# Altium PCB Master v2.PcbDoc
Units mil, origin at the board's own origin, x right, y up, seen from the top; angles counter-clockwise.
Board outline 1480 x 1080 mil, 2 copper layers (Top Layer, Bottom Layer); 28 components, 24 nets, 68 pads, 15 vias.
Unrouted connection lines stored in the file: 5.
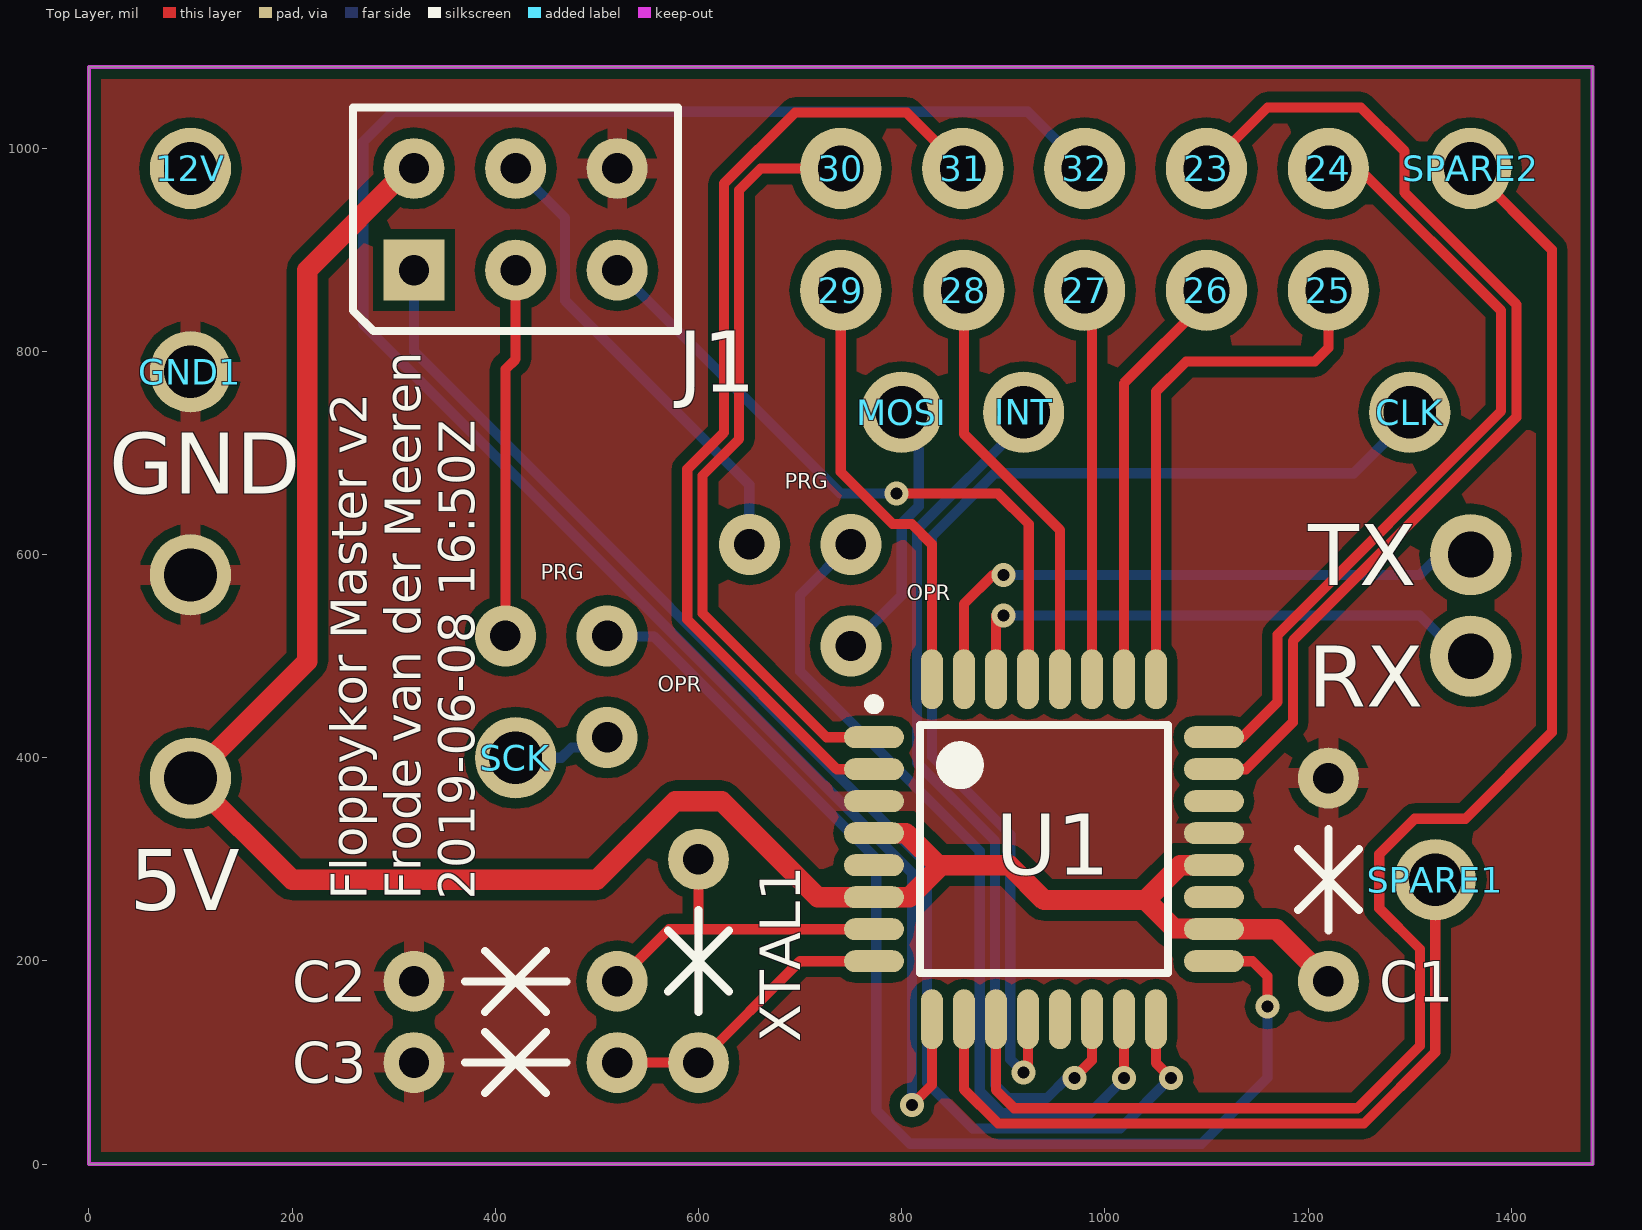
[diagram p0: Top Layer view]
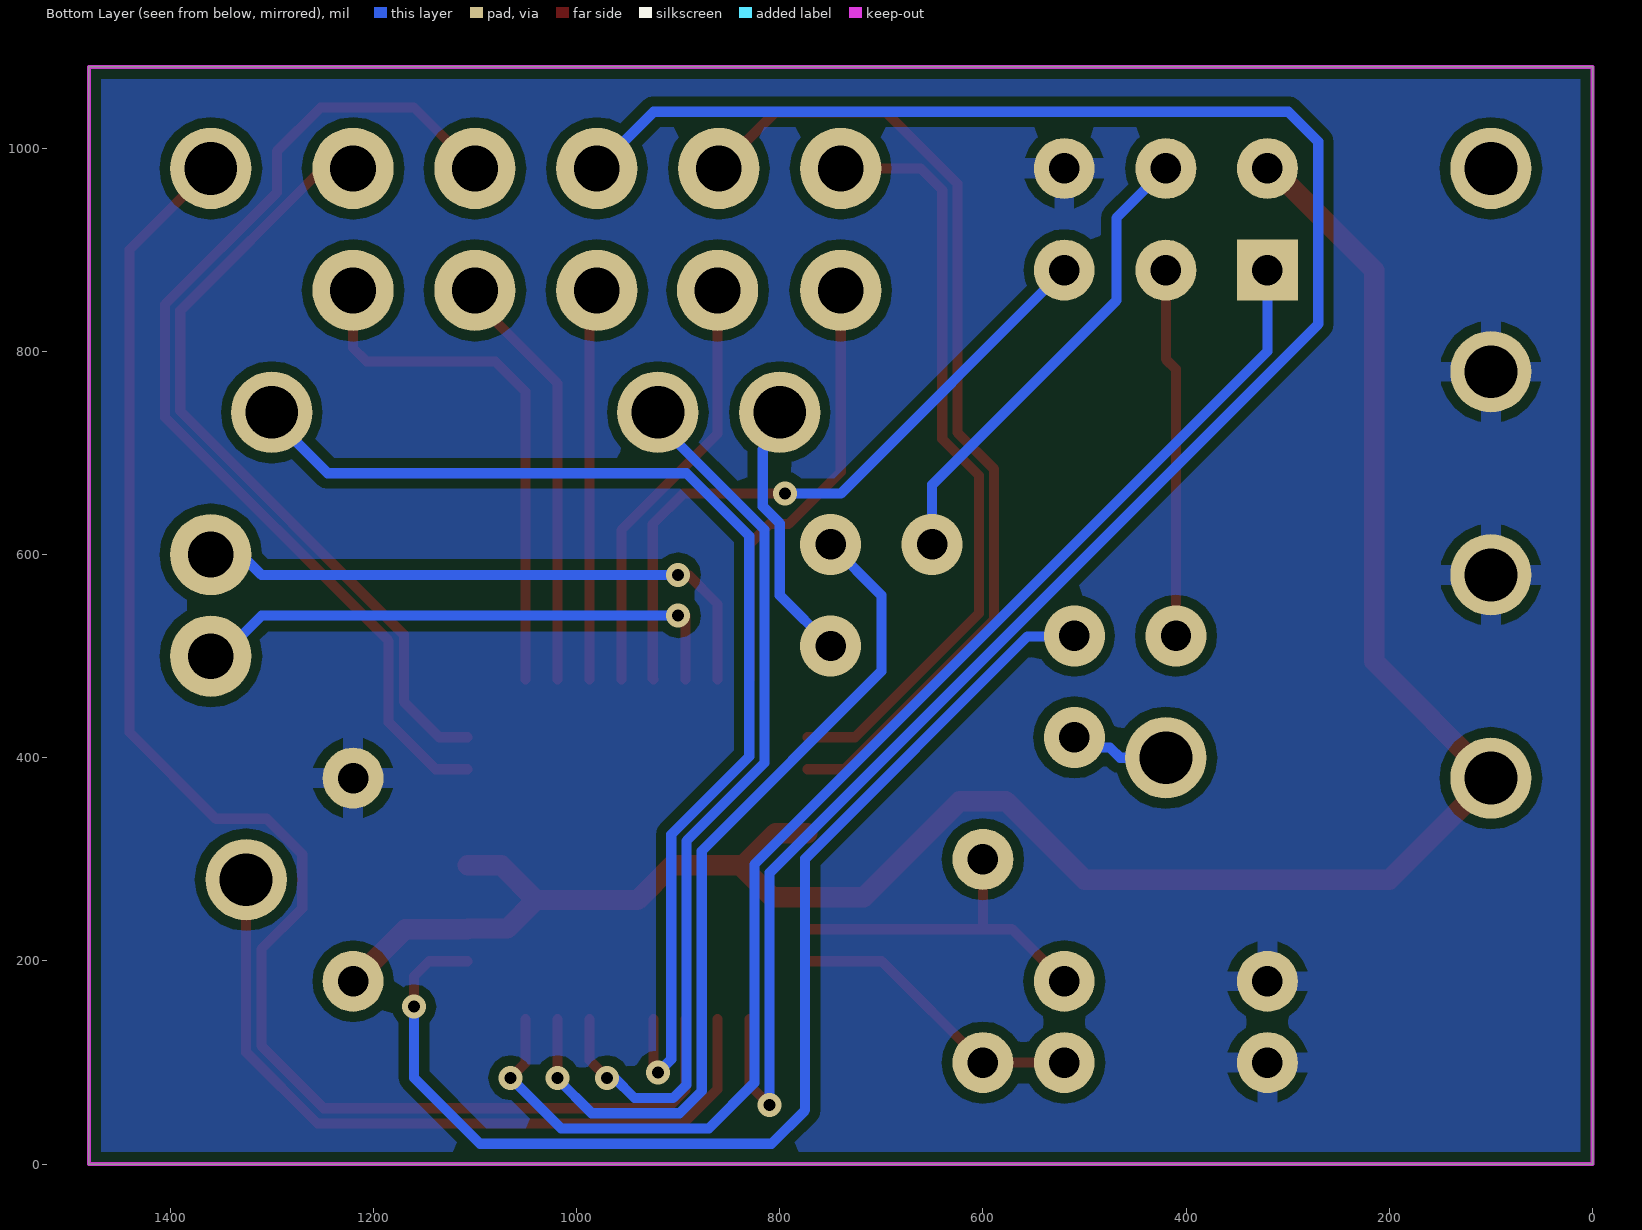
[diagram p1: Bottom Layer view, seen from below]

## Layer stack, top to bottom
Top Solder: solder mask 0.4, Solder Resist, Dk 3.5
Top Layer: signal copper 1.4
Dielectric 1: dielectric 12.6, FR-4, Dk 4.8
Bottom Layer: signal copper 1.4
Bottom Solder: solder mask 0.4, Solder Resist, Dk 3.5

## Board outline
0,0 1480,0 1480,1080 0,1080

## Design rules (kind name [scope] priority, off if disabled: settings)
Clearance [All] p1: gap=5 ignorepadtopadclearanceinfootprint=FALSE except(0: Arc-Hole Track-Hole SMDPad-Hole THPad-Hole Via-Hole Fill-Hole Poly-Hole Region-Hole Text-Hole; 10: Arc-Poly Track-Poly SMDPad-Poly THPad-Poly Via-Poly Fill-Poly Poly-Poly Poly-Region Poly-Text)
PolygonConnect [All] p1: connectstyle=Relief reliefconductorwidth=20 reliefentries=4 polygonreliefangle="90 Angle" airgapwidth=10
RoutingVias [All] p1: holewidth=28 width=50 viastyle="Through Hole" minholewidth=28 minwidth=50 maxholewidth=28 maxwidth=50
SolderMaskExpansion [All] p1: expansion=4
Width [All] p1: maxlimit=100 minlimit=10 preferedwidth=10
30 further rules are at their usual default settings.

## Components (designator, comment, footprint, x,y, rotation, side; value= is the part's Value field where it differs from the comment)
5V "BigHole" MEDHOLE#1 -400,-2620 r0 top
12V "BigHole" MEDHOLE#1 -400,-2020 r0 top
23 "BigHole" BigHole#1 1000,680 r0 top
24 "BigHole" BigHole#1 1120,680 r0 top
25 "BigHole" BigHole#1 1120,560 r0 top
26 "BigHole" BigHole#2 3490,3040 r0 top
27 "BigHole" BigHole#1 880,560 r0 top
28 "BigHole" BigHole#1 761.26,560 r0 top
29 "BigHole" BigHole#1 640,560 r0 top
30 "BigHole" BigHole#1 640,680 r0 top
31 "BigHole" BigHole#1 760,680 r0 top
32 "BigHole" BigHole#1 880,680 r0 top
C1 "Component_1" 200mil 1220,280 r270 top
C2 "Component_1" 200mil 420,180 r0 top
C3 "Component_1" 200mil 420,100 r0 top
CLK "BigHole" MEDHOLE#2 660,-2260 r0 top
GND "BigHole" MEDHOLE#1 3100,80 r90 top (schematic designator GND2)
GND1 "BigHole" MEDHOLE#1 3100,280 r90 top
INT "BigHole" MEDHOLE#1 420,-2260 r0 top
J1 "AVR_ISP" HEADER6 120,380 r0 top
MOSI "BigHole" MEDHOLE#1 3800,240 r90 top
RX "BigHole" MEDHOLE#3 860,-2520 r0 top
SCK "BigHole" MEDHOLE#4 -300,-1560 r0 top
SPARE1 "BigHole" MEDHOLE#5 4500,-220 r90 top
SPARE2 "BigHole" MEDHOLE#6 4680,200 r90 top
TX "BigHole" MEDHOLE#7 860,-2390 r0 top
U1 "=navn" TQFP80P900X900X120 940,310 r0 top
XTAL1 "Component_1" 200mil 600,200 r270 top

## Footprints (in the part's own frame and the unit in brackets; to place one, negate y for a bottom-side part, rotate by r counter-clockwise, add the part's x,y. Pads: shape width x height; smd on the part's side, far side on the other; paste and mask are expansions set on the pad)
200mil [mil]
  round 60 hole 30: 1(-100,0) 2(100,0)
  silkscreen extent -50,-30 50,30
BigHole#1 [mil]
  round 80 hole 45: 1(100,300)
BigHole#2 [mil]
  round 80 hole 45: 1(-2390,-2180)
HEADER6 [mil]
  rect 60x60 hole 30: 1(200,500)
  round 60 hole 30: 2(200,600) 3(300,500) 4(300,600) 5(400,500) 6(400,600)
  silkscreen extent 140,440 460,660
MEDHOLE#1 [mil]
  round 80 hole 52: 1(500,3000)
MEDHOLE#2 [mil]
  round 80 hole 52: 1(640,3000)
MEDHOLE#3 [mil]
  round 80 hole 45: 1(500,3020)
MEDHOLE#4 [mil]
  round 80 hole 52: 1(720,1960)
MEDHOLE#5 [mil]
  round 80 hole 52: 1(500,3174.78)
MEDHOLE#6 [mil]
  round 80 hole 52: 1(780,3320)
MEDHOLE#7 [mil]
  round 80 hole 45: 1(500,2990)
TQFP80P900X900X120 [mm] "TQFP, 32-Leads, Body 7,00x7,00mm, Pitch 0,80mm, IPC Medium Density"
  oval 1.5x0.55 smd: 1(-4.25,2.8) 2(-4.25,2) 3(-4.25,1.2) 4(-4.25,0.4) 5(-4.25,-0.4) 6(-4.25,-1.2) 7(-4.25,-2) 8(-4.25,-2.8) 17(4.25,-2.8) 18(4.25,-2) 19(4.25,-1.2) 20(4.25,-0.4) 21(4.25,0.4) 22(4.25,1.2) 23(4.25,2) 24(4.25,2.8)
  oval 0.55x1.5 smd: 9(-2.8,-4.25) 10(-2,-4.25) 11(-1.2,-4.25) 12(-0.4,-4.25) 13(0.4,-4.25) 14(1.2,-4.25) 15(2,-4.25) 16(2.8,-4.25) 25(2.8,4.25) 26(2,4.25) 27(1.2,4.25) 28(0.4,4.25) 29(-0.4,4.25) 30(-1.2,4.25) 31(-2,4.25) 32(-2.8,4.25)
  silkscreen extent -4.37,-3.1 3.1,3.75, body extent -4.51,-4.51 4.51,4.51, height 1.1

## Part data
U1: library part ATMEGA168V

## Via types
v1: diameter 23.62, hole 11.81, Top Layer to Bottom Layer, tented both sides, 9 vias
v2: diameter 60, hole 30, Top Layer to Bottom Layer, 6 vias

## Nets (pads, with @x,y where several pads share a name; then routed paths per layer and width w, separated by ;. In a path a pad name is that pad's centre, name@x,y a point inside that pad or via, vN(x,y) a via of type N, cw(c..) or ccw(c..) an arc to the next point about the centre after c; other vN are vias at no path point)
GND: C1.1 C2.1 C3.1 GND1.1 GND.1 J1.6 U1.3 U1.5 U1.21
Net23_1: 23.1 U1.23 | length 1033.1
  Top Layer w10: 23.1 1160,1040 1251.92,1040 1295,996.92 1295,956.21 1405,846.21 1405,735 1185,515 1185,435 1138.74,388.74 U1.23
Net24_1: 24.1 U1.24 | length 781.2
  Top Layer w10: U1.24 1135.24,420.24 1170,455 1170,521.21 1390,741.21 1390,840 1250,980 24.1
Net25_1: 25.1 U1.25 | length 527.2
  Top Layer w10: U1.25 1050.24,760.24 1080,790 1206.65,790 1220,803.35 25.1
Net26_1: 26.1 U1.26 | length 416.3
  Top Layer w10: U1.26 1018.74,768.5 1100,849.76 26.1
Net27_1: 27.1 U1.27 | length 385.7
  Top Layer w10: 27.1 987.24,852.76 U1.27
Net28_1: 28.1 U1.28 | length 440.6
  Top Layer w10: 28.1@880,860 28.1 861.26,718.74 955.75,624.25 U1.28
Net29_1: 29.1 U1.32 | length 430.8
  Top Layer w10: 29.1 740,681.29 791.29,630 810,630 829.76,610.24 U1.32
Net30_1: 30.1 U1.1 | length 759.5
  Top Layer w10: 30.1 661.21,980 640,958.79 640,713.79 603.97,677.76 603.97,542.24 725.98,420.24 U1.1
Net31_1: 31.1 U1.2 | length 975.4
  Top Layer w10: U1.2 736.26,388.74 588.97,536.03 588.97,683.97 625,720 625,965 695,1035 805,1035 31.1
Net32_1: 32.1 U1.9 | length 2009.8
  Top Layer w10: v1(810,58.19) 829.76,77.95 U1.9
  Bottom Layer w10: v1(810,58.19) 810,286.76 270,826.76 270,1006.29 299.56,1035.85 924.15,1035.85 32.1
NetC2_2: C2.2 U1.7 XTAL1.1 | length 342.6
  Top Layer w10: C2.2 571.26,231.26 600,231.26 ; XTAL1.1 600,231.26 ; U1.7 600,231.26
NetC3_2: C3.2 U1.8 XTAL1.2 | length 294
  Top Layer w10: C3.2 XTAL1.2 699.76,199.76 U1.8
NetCLK_1: CLK.1 U1.12 | length 1151.8
  Top Layer w10: v1(920,90) 924.25,85.75 U1.12
  Bottom Layer w10: v1(920,90) 906.81,103.19 906.81,324.4 830,401.21 830,618.23 891.77,680 1245,680 1300,735 CLK.1
NetINT_1: INT.1 U1.14 | length 893.8
  Top Layer w10: v1(970,85) 987.24,102.24 U1.14
  Bottom Layer w10: INT.1 920,729.45 815,624.45 815,395 891.81,318.19 891.81,78.19 904.94,65.06 942.98,65.06 962.92,85 v1(970,85)
NetJ1_1: J1.1 U1.16 | length 1352.3
  Top Layer w10: U1.16 1050.24,99.76 v1(1065,85)
  Bottom Layer w10: J1.1 320,800 825,295 825,80 869.94,35.06 1015.06,35.06 v1(1065,85)
NetJ1_3: J1.3 SCK.1 U1.17 | length 1659.9
  Top Layer w10: v2@410,505 v2(410,520) 410,782.35 420,792.35 J1.3 ; U1.17 1145.24,199.76 1160,185 v1(1160,155)
  Bottom Layer w10: SCK.1 465,400 475,410 500,410 v2(510,420) ; v2@515,519.45 556.09,519.45 775,300.54 775,53.19 808.13,20.06 1095.06,20.06 1160,85 v1(1160,155)
  other v2: 510,520
NetJ1_4: J1.4 MOSI.1 U1.15 | length 1599.9
  Top Layer w10: v1(1018.74,85) U1.15
  Bottom Layer w10: J1.4 468.71,931.29 468.71,849.96 650,668.67 v2(650,610) ; v2@740,513.05 v2@750,503.05 ; v2(750,510) 800,560 800,630.66 816.81,647.47 816.81,703.19 800,720 MOSI.1 ; v2(750,610) 700,560 700,485 876.81,308.19 876.81,71.98 898.73,50.06 985.06,50.06 1018.74,83.74 v1(1018.74,85)
NetJ1_5: J1.5 U1.29 | length 661.5
  Top Layer w10: v1(795,660) 895,660 925,630 925,478.07 U1.29
  Bottom Layer w10: J1.5 740,660 v1(795,660)
NetRX_1: RX.1 U1.30 | length 539.2
  Top Layer w10: U1.30 v1@892.76,540
  Bottom Layer w10: v1(900,540) 1310,540 1350,500 RX.1
NetSPARE1_1: SPARE1.1 U1.10 | length 745.7
  Top Layer w10: U1.10 861.26,73.74 895,40 1255,40 1325.22,110.22 SPARE1.1
NetSPARE2_1: SPARE2.1 U1.11 | length 1533.1
  Top Layer w10: U1.11 892.76,72.96 910.71,55 1248.79,55 1310.22,116.43 1310.22,211.71 1270,251.93 1270,305 1305,340 1355,340 1440,425 1440,900 SPARE2.1
NetTX_1: TX.1 U1.31 | length 602.9
  Top Layer w10: U1.31 861.26,551.26 890,580 v1(900,580)
  Bottom Layer w10: v1(900,580) 1310.22,580 1325.22,595 1355,595 1355,605 TX.1
VCC: 5V.1 C1.2 J1.2 U1.4 U1.6 U1.18 U1.20 | length 2146.7
  Top Layer w20: J1.2 317.5,982.5 215,880 215,495 5V.1 200,280 500,280 577.24,357.24 622.76,357.24 717.24,262.76 U1.6 807.52,262.76 837.38,292.62 804.25,325.75 U1.4 ; 839.02,294.25 905.75,294.25 940,260 1040,260 ; U1.20 1074.25,294.25 1040,260 ; C1.2 1168.74,231.26 U1.18 1106.65,231.93 1068.07,231.93 1040,260
pads on no net: 12V.1 U1.13 U1.19 U1.22

## Polygon pours and split planes (outlines as drawn)
GND on Top Layer "GND" (solid, remove dead copper, pour order 2): 0,0 1480,0 1480,1080 0,1080
GND on Bottom Layer "GND" (solid, remove dead copper, pour order 4): 0,1080 0,0 1480,0 1480,1080

## Keep-outs
Keep-Out Layer:
  the board outline again, w3.94

## Silkscreen, mask and mechanical layers (free items; w line width, h text height)
Top Overlay:
  text "PRG" at 685,665 h15
  text "PRG" at 445,575 h15
  text "OPR" at 805,555 h15
  text "OPR" at 560,465 h15
  text "Floppykor Master v2 / Frode van der Meeren / 2019-06-08 16:50Z" at 380,260 h35.43 r90